# EAGLE board OpenBook Schematic v34 (EAGLE 9.7.0)
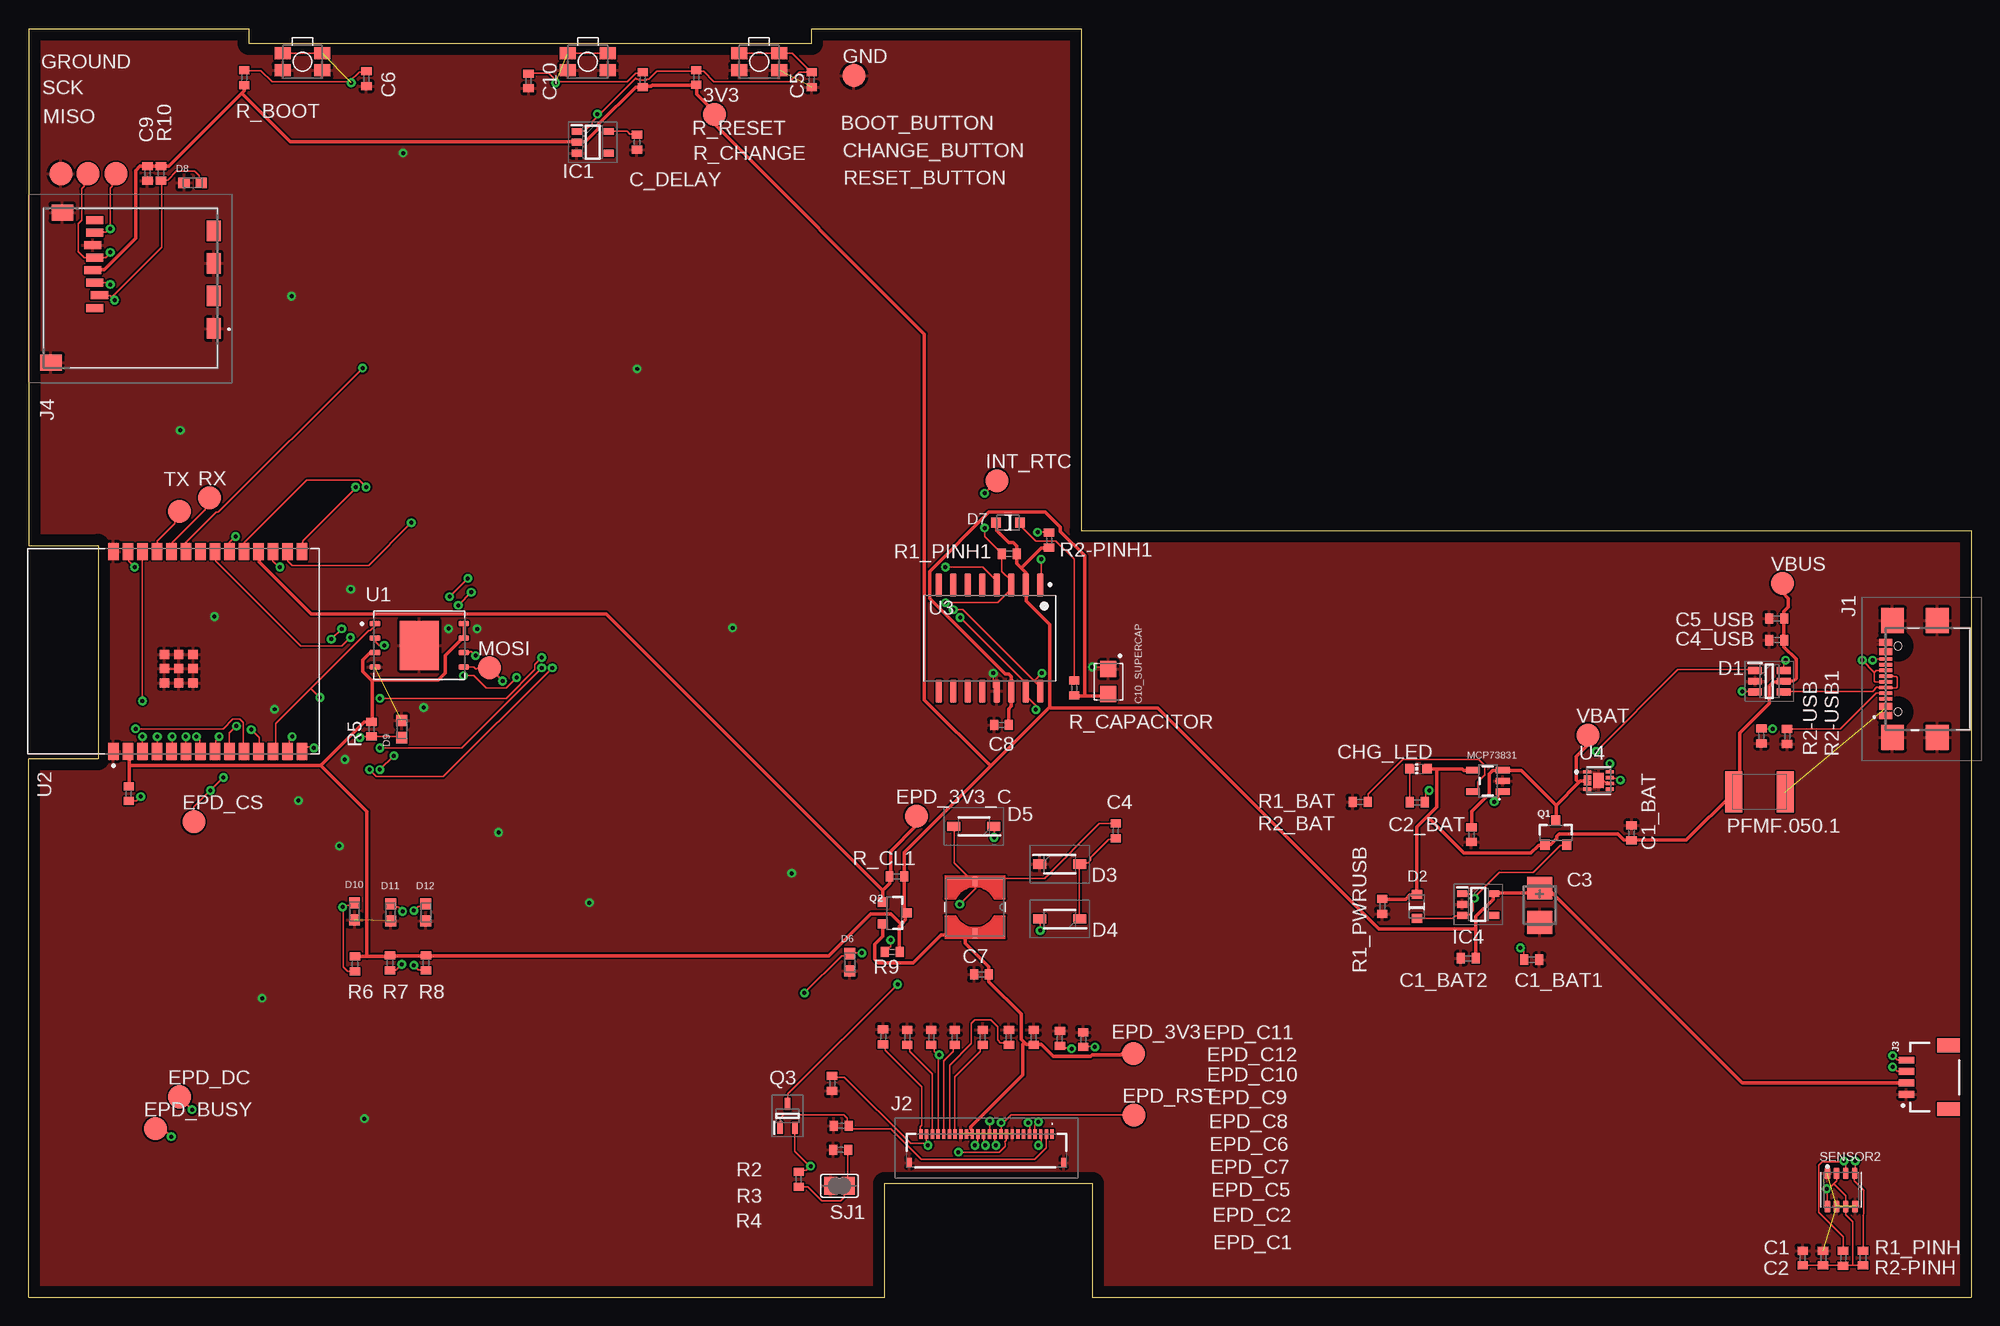
[diagram p0: board, top side]
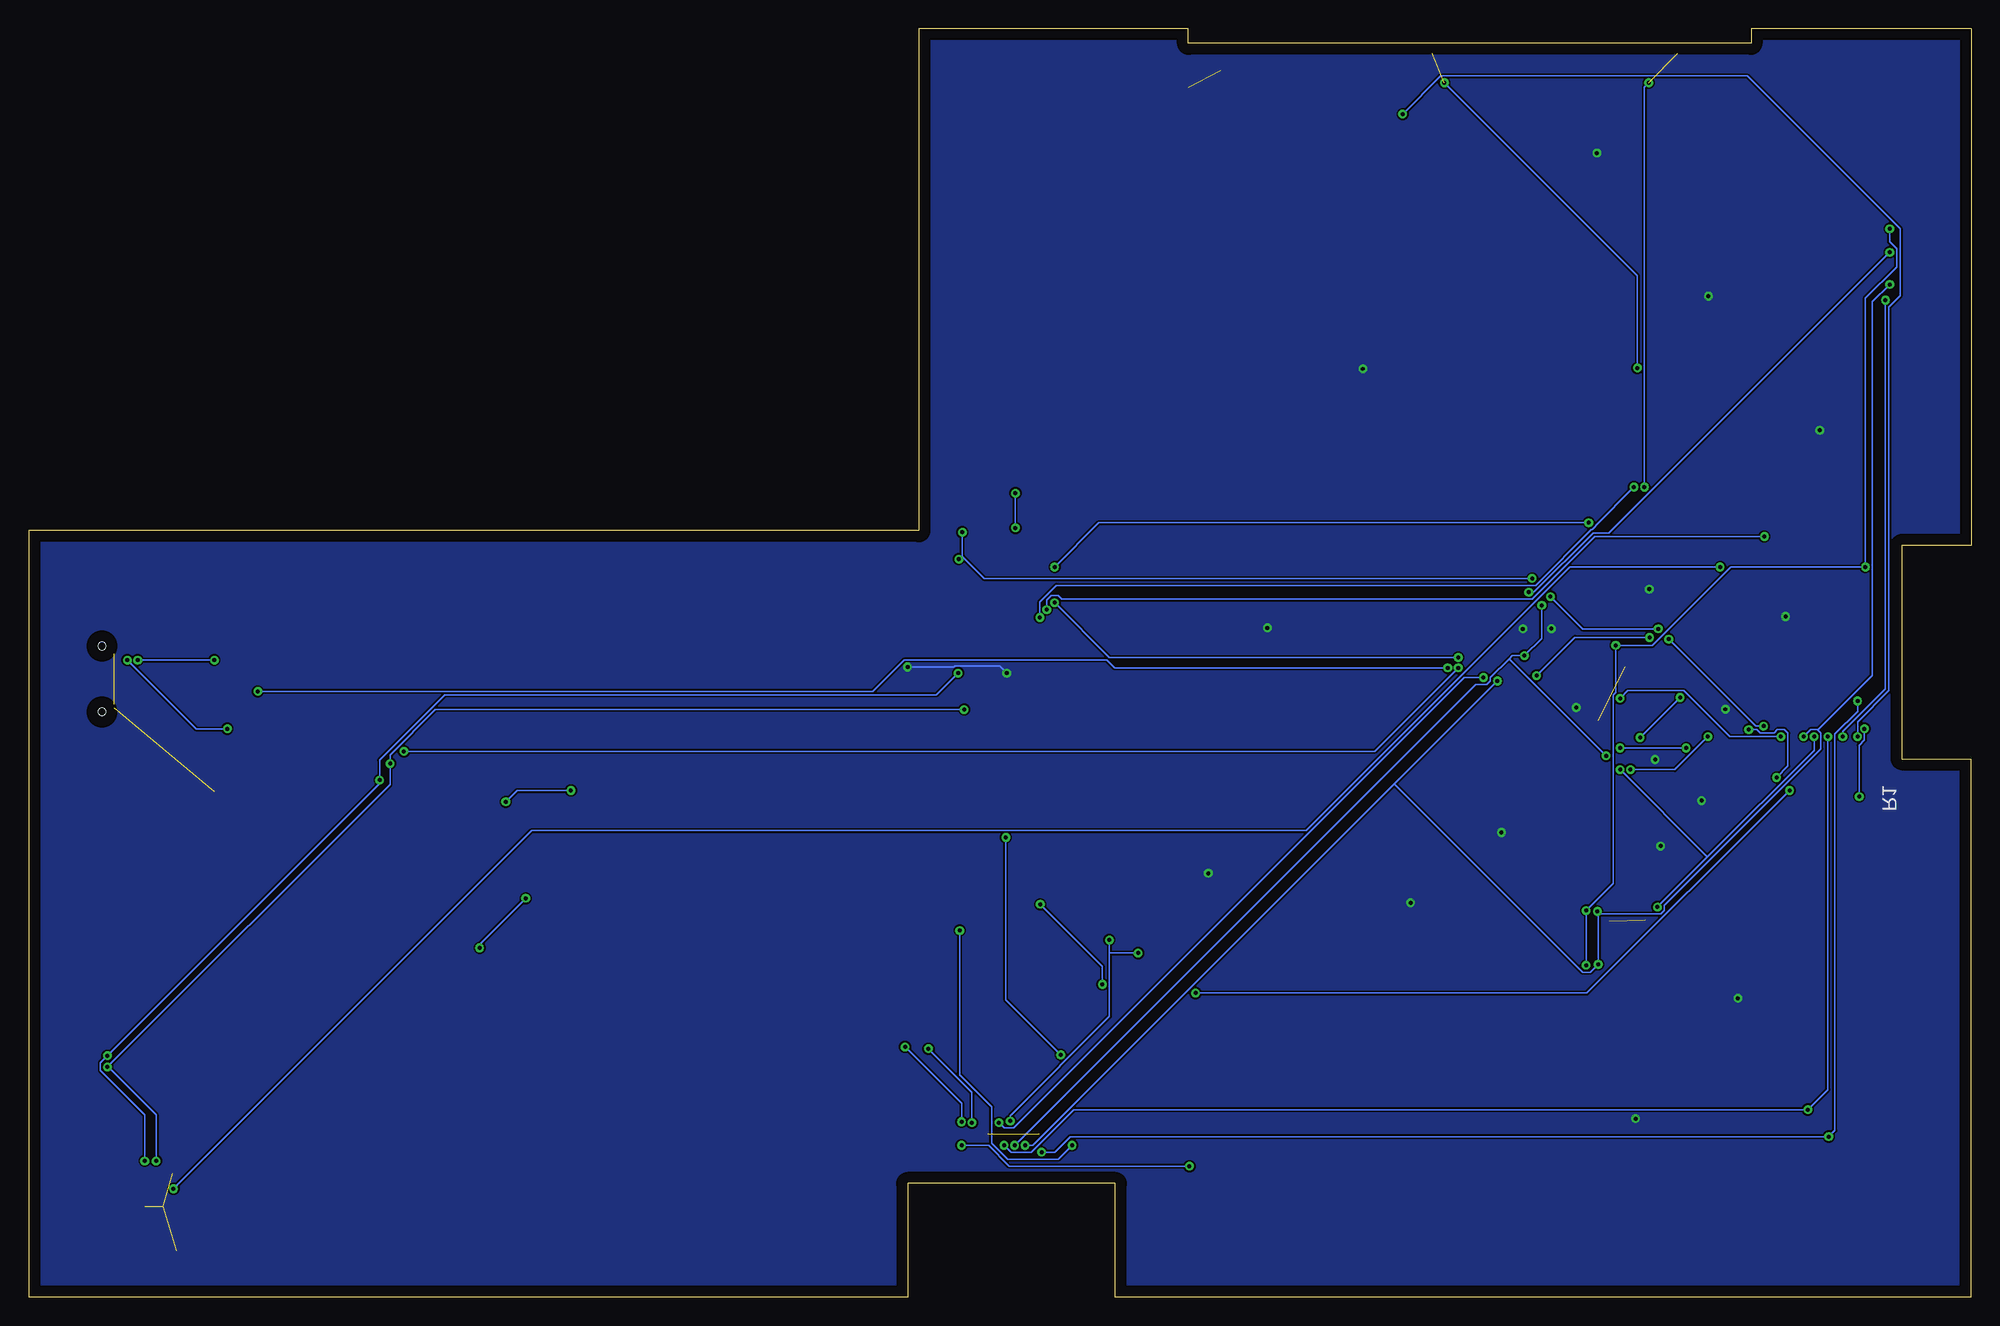
[diagram p1: board, bottom side, seen from below]

Size 170.2 x 111.2 mm. Coordinates in mm from the lower left corner, seen from the top.
Outline: 0.01,47.3 0,47.31
Outline: 92.2,111.2 92.2,67.2 170.2,67.2 170.2,0 93.2,0 93.2,10 75,10 75,0 0,0 0,47.2 6.1,47.2 6.1,65.9 0,65.9 0,111.2 19.3,111.2 19.3,109.9 68.6,109.9 68.6,111.2 92.2,111.2
Copper layers (1*16): Top 0.035mm / dielectric 1.5mm / Bottom 0.035mm
Design rules "jlcpcb-2layers.dru": minimum track width 6mil, minimum drill 0.35mm, track to track 6mil, track to pad 6mil, pad to pad 6mil, via to via 6mil, smd to smd 6mil, copper to edge 40mil, drill to drill 6mil, minimum pad ring 10mil, minimum via ring 8mil, stop-mask expansion 4mil, vias tented up to drill 0mil, thermal gap 10mil
Net classes: 1 POWER NETS: width 0.3 mm; 2 NORMAL NETS: width 0.15 mm

## Footprints (pad centres in the part's own frame; a part is rotated, then mirrored left to right if it is on the bottom)
TP20R = smd 2 x 2: TP 0,0
MYBUTTON = smd 1.4 x 1.05: 1 1.75,0.75; 2 -1.75,0.75; 3 -1.75,-0.75; 4 1.75,-0.75
EAGLE-LTSPICE_C0402 = smd 0.7 x 0.9: 1 -0.65,0; 2 0.65,0
RCL_CT3528 = smd 2 x 2.2: + -1.5,0; - 1.5,0
CAPCP3225X100N = smd 1.4 x 1.4: 1 -1.1,0; 2 1.1,0
ADAFRUIT_CHIP-LED0603 = smd 0.8 x 0.8: A 0,-0.75; C 0,0.75
SOT95P280X145-6N = smd 1.2 x 0.6: 1 -1.25,0.95; 2 -1.25,0; 3 -1.25,-0.95; 4 1.25,-0.95; 5 1.25,0; 6 1.25,0.95
ESP32_WROVER_AVX---SD0805S020S1R0_AVX_SD0805S020S1R0_0 = smd 0.8 x 0.9: 1 -1.05,0; 2 1.05,0
SOD3716X135N = smd 1.15 x 0.8: 1 -1.75,0; 2 1.75,0
DIOC1608X36N = smd 0.97 x 0.94: 1 -0.75,0; 2 0.75,0
SOT95P280X125-5N = smd 0.9 x 0.6: 1 -1.4,0.95; 2 -1.4,0; 3 -1.4,-0.95; 4 1.4,-0.95; 5 1.4,0.95
SOT95P280X120-5N = smd 0.9 x 0.6: 1 -1.4,0.95; 2 -1.4,0; 3 -1.4,-0.95; 4 1.4,-0.95; 5 1.4,0.95
SAMACSYS_PARTS_USB4110GFA = smd 0.3 x 1.15: A1 -3.35,3.678; A4 -2.55,3.678; A5 -1.25,3.678; A6 -0.25,3.678; A7 0.25,3.678; A8 1.25,3.678; A9 2.55,3.678; A12 3.35,3.678; B1 3.05,3.678; B4 2.25,3.678; B5 1.75,3.678; B6 0.75,3.678; B7 -0.75,3.678; B8 -1.75,3.678; B9 -2.25,3.678; B12 -3.05,3.678 | smd 2.18 x 2: MP1 -5.11,-0.827; MP2 5.11,-0.827; MP3 -5.11,3.103; MP4 5.11,3.103 | hole 0.65: -2.89,2.603; 2.89,2.603
FH34SRJ24S05SH99 = smd 0.3 x 0.8: 1 5.75,1.45; 2 5.25,1.45; 3 4.75,1.45; 4 4.25,1.45; 5 3.75,1.45; 6 3.25,1.45; 7 2.75,1.45; 8 2.25,1.45; 9 1.75,1.45; 10 1.25,1.45; 11 0.75,1.45; 12 0.25,1.45; 13 -0.25,1.45; 14 -0.75,1.45; 15 -1.25,1.45; 16 -1.75,1.45; 17 -2.25,1.45; 18 -2.75,1.45; 19 -3.25,1.45; 20 -3.75,1.45; 21 -4.25,1.45; 22 -4.75,1.45; 23 -5.25,1.45; 24 -5.75,1.45 | smd 0.4 x 0.8: MP1 6.75,-1.05; MP2 -6.75,-1.05
JST04_1MM_RA = smd 0.6 x 1.35: 1 -1.5,0; 2 -0.5,0; 3 0.5,0; 4 1.5,0 | smd 1.2 x 2: NC1 2.8,-3.675; NC2 -2.8,-3.675
112ATAARR03ATTEND = smd 1.8 x 1.2: G1 10.6,10.4; G2 4.9,10.4; S1 7.75,10.4; S2 2.05,10.4 | smd 1.4 x 1.9: G3 13.6,-3.85; G4 0.45,-2.85 | smd 0.7 x 1.5: P1 8.8,0; P2 7.7,0.4; P3 6.6,0; P4 5.5,-0.2; P5 4.4,0; P6 3.3,-0.2; P7 2.2,0; P8 1.1,0
IND_4828-WE-TPC_WRE = smd 0.813 x 0.406: 1 -2.286,0; 2 2.286,0
ESP32_WROVER_SPARKFUN-IC-POWER_SOT23-5 = smd 0.55 x 1.2: 1 -0.95,-1.3; 2 0,-1.3; 3 0.95,-1.3; 4 0.95,1.3; 5 -0.95,1.3
ESP32C6_VARISTOR_CT/CN1812 = smd 1.5 x 3.6: 1 -2.25,0; 2 2.25,0
ESP32_WROVER_SPARKFUN-DISCRETESEMI_SOT23-3 = smd 0.8 x 0.9: 1 -0.95,-1; 2 0.95,-1; 3 0,1.1
SOT65P210X110-3N = smd 1.05 x 0.5: 1 -1.05,0.65; 2 -1.05,-0.65; 3 1.05,0
ESP32_WROVER_EAGLE-LTSPICE_R0402 = smd 0.7 x 0.9: 1 -0.65,0; 2 0.65,0
ESP32_WROVER_BME680_PSON80P300X300X100-8N = smd 1.016 x 0.5: 1 1.458,1.2; 2 1.458,0.4; 3 1.458,-0.4; 4 1.458,-1.2; 5 -1.458,-1.22; 6 -1.458,-0.4; 7 -1.458,0.4; 8 -1.458,1.2
SJ = smd 1.168 x 1.6: 1 -0.762,0; 2 0.762,0
SON127P600X800X80-9N = smd 0.94 x 0.44: 1 -3.895,1.905; 2 -3.895,0.635; 3 -3.895,-0.635; 4 -3.895,-1.905; 5 3.895,-1.905; 6 3.895,-0.635; 7 3.895,0.635; 8 3.895,1.905 | smd 3.4 x 4.3: 9 0,0
XCVR_ESP32-C6-WROOM-1-N8 = smd 1.5 x 0.9: 1 -8.75,5.26; 2 -8.75,3.99; 3 -8.75,2.72; 4 -8.75,1.45; 5 -8.75,0.18; 6 -8.75,-1.09; 7 -8.75,-2.36; 8 -8.75,-3.63; 9 -8.75,-4.9; 10 -8.75,-6.17; 11 -8.75,-7.44; 12 -8.75,-8.71; 13 -8.75,-9.98; 14 -8.75,-11.25; 15 8.75,-11.25; 16 8.75,-9.98; 17 8.75,-8.71; 18 8.75,-7.44; 19 8.75,-6.17; 20 8.75,-4.9; 21 8.75,-3.63; 22 8.75,-2.36; 23 8.75,-1.09; 24 8.75,0.18; 25 8.75,1.45; 26 8.75,2.72; 27 8.75,3.99; 28 8.75,5.26 | smd 0.8 x 0.8: 29_1 -2.755,0.79; 29_2 -1.505,0.79; 29_3 -0.255,0.79; 29_4 -2.755,-0.46; 29_5 -1.505,-0.46; 29_6 -0.255,-0.46; 29_7 -2.755,-1.71; 29_8 -1.505,-1.71; 29_9 -0.255,-1.71
SOIC127P1032X265-16N = smd 2.05 x 0.59: 1 -4.655,4.445; 2 -4.655,3.175; 3 -4.655,1.905; 4 -4.655,0.635; 5 -4.655,-0.635; 6 -4.655,-1.905; 7 -4.655,-3.175; 8 -4.655,-4.445; 9 4.655,-4.445; 10 4.655,-3.175; 11 4.655,-1.905; 12 4.655,-0.635; 13 4.655,0.635; 14 4.655,1.905; 15 4.655,3.175; 16 4.655,4.445
SON50P200X200X80-9N = smd 0.76 x 0.27: 1 -0.985,0.75; 4 -0.985,-0.75; 5 0.985,-0.75; 6 0.985,-0.25; 7 0.985,0.25; 8 0.985,0.75 | smd 0.762 x 0.406: 2 -0.985,0.25; 3 -0.985,-0.25 | smd 0.9 x 1.3: 9 0,0

## Placement (x,y rotation side)
3V3  TPTP20R  [TP20R]  60.08,103.68 0 top
BOOT_BUTTON  BUTTON_CUSYOMV1  [MYBUTTON]  24,108.29 180 top
C1  100nF  [EAGLE-LTSPICE_C0402]  155.43,3.45 90 top
C1_BAT  4.7uF  [EAGLE-LTSPICE_C0402]  140.42,40.7 90 top
C1_BAT1  4.7uF  [EAGLE-LTSPICE_C0402]  131.69,29.6 0 top
C1_BAT2  4.7uF  [EAGLE-LTSPICE_C0402]  126.12,29.73 180 top
C2  100nF  [EAGLE-LTSPICE_C0402]  157.2,3.45 90 top
C2_BAT  4.7uF  [EAGLE-LTSPICE_C0402]  126.4,40.55 270 top
C3  100uF TANT  [RCL_CT3528]  132.38,34.37 270 top
C4  4.7uF/25V  [EAGLE-LTSPICE_C0402]  95.24,40.87 90 top
C4_USB  100nF  [EAGLE-LTSPICE_C0402]  153.15,57.6 180 top
C5  1uF  [EAGLE-LTSPICE_C0402]  68.6,106.71 270 top
C5_USB  4.7uF  [EAGLE-LTSPICE_C0402]  153.15,59.5 180 top
C6  100nF  [EAGLE-LTSPICE_C0402]  29.6,106.8 270 top
C7  10uF  [EAGLE-LTSPICE_C0402]  83.48,28.32 180 top
C8  100nF  [EAGLE-LTSPICE_C0402]  85.23,50.16 180 top
C9  100nF  [EAGLE-LTSPICE_C0402]  10.42,98.5 270 top
C10  100nF  [EAGLE-LTSPICE_C0402]  43.8,106.6 270 top
C10_SUPERCAP  CPH3225A  [CAPCP3225X100N]  94.6,53.97 270 top
C_DELAY  100nF  [EAGLE-LTSPICE_C0402]  53.3,101.23 270 top
CHANGE_BUTTON  BUTTON_CUSYOMV1  [MYBUTTON]  49,108.29 180 top
CHG_LED  [ADAFRUIT_CHIP-LED0603]  121.76,46.33 90 top
D1  USBLC6-2SC6Y  [SOT95P280X145-6N]  152.5,54 0 top
D2  ESP32_WROVER_AVX---SD0805S020S1R0_AVX_SD0805S020S1R0_0_0AVX_SD0805S020S1R0_0_0  [ESP32_WROVER_AVX---SD0805S020S1R0_AVX_SD0805S020S1R0_0]  121.62,34.27 90 top
D3  MBR0530  [SOD3716X135N]  90.33,37.97 0 top
D4  MBR0530  [SOD3716X135N]  90.33,33.16 180 top
D5  MBR0530  [SOD3716X135N]  82.81,41.28 180 top
D6  PGB1010603MR  [DIOC1608X36N]  71.94,29.38 90 top
D7  ESP32_WROVER_AVX---SD0805S020S1R0_AVX_SD0805S020S1R0_0_0AVX_SD0805S020S1R0_0_0  [ESP32_WROVER_AVX---SD0805S020S1R0_AVX_SD0805S020S1R0_0]  85.8,67.9 180 top
D8  PGB1010603MR  [DIOC1608X36N]  14.37,97.67 0 top
D9  PGB1010603MR  [DIOC1608X36N]  32.7,49.8 270 top
D10  PGB1010603MR  [DIOC1608X36N]  28.56,33.83 90 top
D11  PGB1010603MR  [DIOC1608X36N]  31.72,33.73 90 top
D12  PGB1010603MR  [DIOC1608X36N]  34.8,33.73 90 top
EPD_3V3  TPTP20R  [TP20R]  96.78,21.38 0 top
EPD_3V3_C  TPTP20R  [TP20R]  77.78,42.18 0 top
EPD_BUSY  TPTP20R  [TP20R]  11.11,14.78 0 top
EPD_C1  1uF/50V  [EAGLE-LTSPICE_C0402]  92.4,22.59 270 top
EPD_C2  1uF/50V  [EAGLE-LTSPICE_C0402]  90.35,22.69 270 top
EPD_C5  0.1uF/50V  [EAGLE-LTSPICE_C0402]  88.06,22.79 270 top
EPD_C6  1uF/50V  [EAGLE-LTSPICE_C0402]  83.6,22.79 270 top
EPD_C7  1uF/50V  [EAGLE-LTSPICE_C0402]  85.88,22.79 270 top
EPD_C8  1uF/50V  [EAGLE-LTSPICE_C0402]  81.14,22.79 270 top
EPD_C9  1uF/50V  [EAGLE-LTSPICE_C0402]  79.07,22.79 270 top
EPD_C10  1uF/50V  [EAGLE-LTSPICE_C0402]  76.97,22.79 270 top
EPD_C11  1uF/50V  [EAGLE-LTSPICE_C0402]  70.39,18.75 90 top
EPD_C12  1uF/50V  [EAGLE-LTSPICE_C0402]  74.86,22.85 270 top
EPD_CS  TPTP20R  [TP20R]  14.48,41.68 0 top
EPD_DC  TPTP20R  [TP20R]  13.23,17.58 0 top
EPD_RST  TPTP20R  [TP20R]  96.83,15.98 0 top
GND  TPTP20R  [TP20R]  72.31,107.08 0 top
GROUND  TPTP20R  [TP20R]  2.83,98.48 0 top
IC1  BD5229G-TR  [SOT95P280X125-5N]  49.43,101.23 0 top
IC4  XC6220A331MR-G  [SOT95P280X120-5N]  127,34.44 0 top
INT_RTC  TPTP20R  [TP20R]  84.83,71.58 0 top
J1  SAMACSYS_PARTS_USB4110-GF-A  [SAMACSYS_PARTS_USB4110GFA]  166.38,54.2 90 top
J2  FH34SRJ-24S-0.5SH_99_  [FH34SRJ24S05SH99]  83.92,12.87 0 top
J3  QWIIC_RIGHT_ANGLE  [JST04_1MM_RA]  164.51,19.3 90 top
J4  112A-TAAR-R03_ATTEND  [112ATAARR03ATTEND]  5.82,95.52 270 top
L1  68uH  [IND_4828-WE-TPC_WRE]  82.91,34.2 270 top
MCP73831  ESP32_WROVER_SPARKFUN-IC-POWER_MCP73831  [ESP32_WROVER_SPARKFUN-IC-POWER_SOT23-5]  127.84,45.26 90 top
MISO  TPTP20R  [TP20R]  7.65,98.48 0 top
MOSI  TPTP20R  [TP20R]  40.37,55.18 0 top
PFMF.050.1  ESP32C6_VARISTORCN1812  [ESP32C6_VARISTOR_CT/CN1812]  151.64,44.31 180 top
Q1  20V/4.2A/52mΩ/1.4W  [ESP32_WROVER_SPARKFUN-DISCRETESEMI_SOT23-3]  133.79,40.69 0 top
Q2  20V/4.2A/52mΩ/1.4W  [ESP32_WROVER_SPARKFUN-DISCRETESEMI_SOT23-3]  75.83,33.69 270 top
Q3  SI1308EDL-T1-GE3  [SOT65P210X110-3N]  66.48,15.91 90 top
R1  10K  [ESP32_WROVER_EAGLE-LTSPICE_R0402]  8.78,44.15 90 top
R1_BAT  200  [ESP32_WROVER_EAGLE-LTSPICE_R0402]  121.66,43.39 0 top
R1_PINH  10K  [ESP32_WROVER_EAGLE-LTSPICE_R0402]  158.95,3.45 270 top
R1_PINH1  10K  [ESP32_WROVER_EAGLE-LTSPICE_R0402]  85.9,65.17 0 top
R1_PWRUSB  100k  [ESP32_WROVER_EAGLE-LTSPICE_R0402]  118.58,34.27 90 top
R2  2.2  [ESP32_WROVER_EAGLE-LTSPICE_R0402]  71.14,12.93 0 top
R2-PINH  10K  [ESP32_WROVER_EAGLE-LTSPICE_R0402]  160.7,3.45 270 top
R2-PINH1  10K  [ESP32_WROVER_EAGLE-LTSPICE_R0402]  89.4,66.36 270 top
R2-USB  5k1  [ESP32_WROVER_EAGLE-LTSPICE_R0402]  151.8,49.2 270 top
R2-USB1  5k1  [ESP32_WROVER_EAGLE-LTSPICE_R0402]  154.05,49.17 90 top
R2_BAT  2K  [ESP32_WROVER_EAGLE-LTSPICE_R0402]  116.65,43.43 0 top
R3  0.47  [ESP32_WROVER_EAGLE-LTSPICE_R0402]  67.48,10.36 90 top
R4  10K  [ESP32_WROVER_EAGLE-LTSPICE_R0402]  71.19,15.04 0 top
R5  10K  [ESP32_WROVER_EAGLE-LTSPICE_R0402]  30.05,49.8 90 top
R6  10K  [ESP32_WROVER_EAGLE-LTSPICE_R0402]  28.6,29.22 90 top
R7  10K  [ESP32_WROVER_EAGLE-LTSPICE_R0402]  31.66,29.32 90 top
R8  10K  [ESP32_WROVER_EAGLE-LTSPICE_R0402]  34.82,29.32 90 top
R9  10K  [ESP32_WROVER_EAGLE-LTSPICE_R0402]  75.65,30.29 0 top
R10  10K  [ESP32_WROVER_EAGLE-LTSPICE_R0402]  11.6,98.5 90 top
R_BOOT  10K  [ESP32_WROVER_EAGLE-LTSPICE_R0402]  18.9,106.9 270 top
R_CAPACITOR  15  [ESP32_WROVER_EAGLE-LTSPICE_R0402]  91.6,53.4 270 top
R_CHANGE  10K  [ESP32_WROVER_EAGLE-LTSPICE_R0402]  53.8,106.71 270 top
R_CL1  10K  [ESP32_WROVER_EAGLE-LTSPICE_R0402]  76.07,36.89 0 top
R_RESET  10K  [ESP32_WROVER_EAGLE-LTSPICE_R0402]  58.5,106.91 270 top
RESET_BUTTON  BUTTON_CUSYOMV1  [MYBUTTON]  64,108.29 180 top
RX  TPTP20R  [TP20R]  15.87,70.08 0 top
SCK  TPTP20R  [TP20R]  5.19,98.48 0 top
SENSOR2  ESP32_WROVER_BME680_BME680  [ESP32_WROVER_BME680_PSON80P300X300X100-8N]  158.78,9.43 90 top
SJ1  [SJ]  71.04,9.79 0 top
TX  TPTP20R  [TP20R]  13.22,68.88 0 top
U1  W25Q512JVEIQ  [SON127P600X800X80-9N]  34.23,57.15 0 top
U2  ESP32-C6-WROOM-1-N8  [XCVR_ESP32-C6-WROOM-1-N8]  12.7,56.61 90 top
U3  DS3231SN#  [SOIC127P1032X265-16N]  84.19,57.78 270 top
U4  MAX17048G+T10  [SON50P200X200X80-9N]  137.53,45.3 0 top
VBAT  TPTP20R  [TP20R]  136.59,49.28 0 top
VBUS  TPTP20R  [TP20R]  153.63,62.58 0 top

## Library data of the parts
3V3 BOOT_BUTTON CHANGE_BUTTON CHG_LED EPD_3V3 EPD_3V3_C EPD_BUSY EPD_CS EPD_DC EPD_RST GND GROUND INT_RTC MISO MOSI PFMF.050.1 RESET_BUTTON RX SCK SJ1 TX VBAT VBUS = DeskAssistant v19 v1
C1 C1_BAT C1_BAT1 C1_BAT2 C2 C2_BAT C4 C4_USB C5 C5_USB C6-C10 C_DELAY EPD_C1 EPD_C2 EPD_C5-EPD_C12 = DeskAssistant v19 v1; SPICEMODEL: NONE; SPICEPREFIX: C
C3 = DeskAssistant v19 v1; SPICEPREFIX: C
C10_SUPERCAP = DeskAssistant v19 v1; AVAILABILITY: Not in stock; CHECK_PRICES: https://www.snapeda.com/parts/CPH3225A/Seiko+Instruments/view-part/?ref=eda; DESCRIPTION: 11 mF (EDLC) Supercapacitor 3.3 V 1210 (3225 Metric) - -; MF: Seiko Instruments; MP: CPH3225A; PACKAGE: 1210 Seiko; PRICE: None; PURCHASE-URL: https://www.snapeda.com/api/url_track_click_mouser/?unipart_id=562593&manufacturer=Seiko Instruments&part_name=CPH3225A&search_term=None; SNAPEDA_LINK: https://www.snapeda.com/parts/CPH3225A/Seiko+Instruments/view-part/?ref=snap
D1 = DeskAssistant v19 v1; AVAILABILITY: In Stock; CHECK_PRICES: https://www.snapeda.com/parts/USBLC6-2SC6Y/STMicroelectronics/view-part/?ref=eda; DESCRIPTION: 17V Clamp 5A (8/20µs) Ipp Tvs Diode Surface Mount SOT-23-6; MF: STMicroelectronics; MP: USBLC6-2SC6Y; PACKAGE: SOT-23-6 STMicroelectronics; PRICE: None; SNAPEDA_LINK: https://www.snapeda.com/parts/USBLC6-2SC6Y/STMicroelectronics/view-part/?ref=snap
D2 D7 = DeskAssistant v19 v1; CENTROID_NOT_SPECIFIED: No; DATASHEET: http://datasheets.avx.com/schottky.pdf; DIGIKEY_DESCRIPTION: DIODE SCHOTTKY 20V 1A 0805; DIGIKEY_PART_NUMBER: 478-7800-1-ND; LEAD_FREE: yes; MF: AVX; MOUSER_PART_NUMBER: 581-SD0805S020S1R0; PACKAGE: 0805 (2012 metric); PREFIX: D; ROHS: yes; TEMPERATURE_RANGE_HIGH: +125°C; TEMPERATURE_RANGE_LOW: -55°C
D3-D5 = DeskAssistant v19 v1; AVAILABILITY: In Stock; CHECK_PRICES: https://www.snapeda.com/parts/MBR0530/Onsemi/view-part/?ref=eda; DESCRIPTION: Diode Schottky 30 V 500mA Surface Mount SOD-123; MF: ON Semiconductor; MP: MBR0530; PACKAGE: SOD-123-2 ON Semiconductor; PRICE: None; PURCHASE-URL: https://www.snapeda.com/api/url_track_click_mouser/?unipart_id=179458&manufacturer=ON Semiconductor&part_name=MBR0530&search_term=None; SNAPEDA_LINK: https://www.snapeda.com/parts/MBR0530/Onsemi/view-part/?ref=snap
D6 D8-D12 = DeskAssistant v19 v1; AVAILABILITY: In Stock; CHECK_PRICES: https://www.snapeda.com/parts/PGB1010603MR/Littelfuse/view-part/?ref=eda; DESCRIPTION: 150V (Typ) Clamp - Ipp Tvs Diode Surface Mount 0603 (1608 Metric); MF: Littelfuse Inc.; MP: PGB1010603MR; PACKAGE: 0603 Littelfuse Inc.; PRICE: None; PURCHASE-URL: https://www.snapeda.com/api/url_track_click_mouser/?unipart_id=5659453&manufacturer=Littelfuse Inc.&part_name=PGB1010603MR&search_term=None; SNAPEDA_LINK: https://www.snapeda.com/parts/PGB1010603MR/Littelfuse/view-part/?ref=snap
IC1 = DeskAssistant v19 v1; DESCRIPTION: Voltage Detector with Adjustable Delay Time: CMOS processes are utilized to develop high precision, low current consumption CMOS reset ICs that allow arbitrary setting of the delay time. The extensive lineup includes both Nch Open Drain and CMOS output types in a wide range of detection voltages (from 2.3V to 6.0V, in 0.1V steps), enabling selection of the ideal solution based on customer requirements. In addition, the entire series is of course both lead-free and RoHS-compliant.; HEIGHT: 1.25mm; MANUFACTURER_NAME: ROHM Semiconductor; MANUFACTURER_PART_NUMBER: BD5229G-TR; MOUSER_PART_NUMBER: 755-BD5229G-TR; MOUSER_PRICE-STOCK: https://www.mouser.co.uk/ProductDetail/ROHM-Semiconductor/BD5229G-TR?qs=4kLU8WoGk0vvnhrrYwdszw%3D%3D
IC4 = DeskAssistant v19 v1; DESCRIPTION: LDO Voltage Regulators; HEIGHT: 1.2mm; MANUFACTURER_NAME: Torex; MANUFACTURER_PART_NUMBER: XC6220A331MR-G; MOUSER_PART_NUMBER: 865-XC6220A331MR-G; MOUSER_PRICE-STOCK: https://www.mouser.co.uk/ProductDetail/Torex-Semiconductor/XC6220A331MR-G?qs=AsjdqWjXhJ8ZSWznL1J0gg%3D%3D
J1 = DeskAssistant v19 v1; DESCRIPTION: CONN USB 2.0 TYPE-C R/A SMT; HEIGHT: 3.26mm; MANUFACTURER_NAME: GCT (GLOBAL CONNECTOR TECHNOLOGY); MANUFACTURER_PART_NUMBER: USB4110-GF-A; MOUSER_PART_NUMBER: 640-USB4110-GF-A; MOUSER_PRICE-STOCK: https://www.mouser.co.uk/ProductDetail/GCT/USB4110-GF-A?qs=KUoIvG%2F9IlYiZvIXQjyJeA%3D%3D
J2 = DeskAssistant v19 v1; DESCRIPTION: 24 Position FFC, FPC Connector Contacts, Top and Bottom 0.020" (0.50mm) Surface Mount, Right Angle; HEIGHT: 1.1mm; MANUFACTURER_NAME: Hirose; MANUFACTURER_PART_NUMBER: FH34SRJ-24S-0.5SH(99); MOUSER_PART_NUMBER: 798-FH34SRJ24S05SH99; MOUSER_PRICE-STOCK: https://www.mouser.co.uk/ProductDetail/Hirose-Connector/FH34SRJ-24S-0.5SH99?qs=vcbW%252B4%252BSTIpKBl5ap9J8Fw%3D%3D
J3 = DeskAssistant v19 v1; PROD_ID: CONN-13694
J4 = DeskAssistant v19 v1; DESCRIPTION: Micro SD Card Socket, Push-Push Type, Top Mount, SMT, H=1.83mm, 10u; HEIGHT: 1.9mm; MANUFACTURER_NAME: ATTEND; MANUFACTURER_PART_NUMBER: 112A-TAAR-R03 ATTEND
L1 = DeskAssistant v19 v1; COPYRIGHT: Copyright (C) 2024 Ultra Librarian. All rights reserved.; MANUFACTURER_PART_NUMBER: 744043680; MFR_NAME: Wurth Electronics
MCP73831 = DeskAssistant v19 v1; PROD_ID: IC-09995
Q1 Q2 = DeskAssistant v19 v1; PROD_ID: TRAN-14388
Q3 = DeskAssistant v19 v1; AVAILABILITY: In Stock; CHECK_PRICES: https://www.snapeda.com/parts/SI1308EDL-T1-GE3/Vishay+Siliconix/view-part/?ref=eda; DESCRIPTION: Si1308EDL-T1-GE3 N-channel MOSFET Transistor, 1.5 A, 30 V, 3-Pin SC-70 | Siliconix / Vishay SI1308EDL-T1-GE3; MF: Vishay Siliconix; MP: SI1308EDL-T1-GE3; PACKAGE: SOT-323 Vishay Semiconductor; PRICE: None; PURCHASE-URL: https://www.snapeda.com/api/url_track_click_mouser/?unipart_id=274603&manufacturer=Vishay Siliconix&part_name=SI1308EDL-T1-GE3&search_term=None; SNAPEDA_LINK: https://www.snapeda.com/parts/SI1308EDL-T1-GE3/Vishay+Siliconix/view-part/?ref=snap
R1 R1_BAT R1_PINH R1_PINH1 R1_PWRUSB R2 R2-PINH R2-PINH1 R2-USB R2-USB1 R2_BAT R3-R10 R_BOOT R_CAPACITOR R_CHANGE R_CL1 R_RESET = DeskAssistant v19 v1; SPICEMODEL: NONE; SPICEPREFIX: R
SENSOR2 = DeskAssistant v19 v1; AVAILABILITY: Unavailable; DESCRIPTION: Integrated Environmental Unit; MF: Bosch Sensortec; MP: BME680; PACKAGE: LGA-8 Bosch Tools; PRICE: None
U1 = DeskAssistant v19 v1; AVAILABILITY: In Stock; CHECK_PRICES: https://www.snapeda.com/parts/W25Q512JVEIQ/Winbond+Electronics/view-part/?ref=eda; DESCRIPTION: FLASH - NOR Memory IC 512Mb (64M x 8) SPI - Quad I/O 133 MHz 8-WSON (8x6); MF: Winbond Electronics; MP: W25Q512JVEIQ; PACKAGE: Package; PRICE: None; SNAPEDA_LINK: https://www.snapeda.com/parts/W25Q512JVEIQ/Winbond+Electronics/view-part/?ref=snap
U2 = DeskAssistant v19 v1; AVAILABILITY: In Stock; CHECK_PRICES: https://www.snapeda.com/parts/ESP32-C6-WROOM-1-N8/Espressif+Systems/view-part/?ref=eda; DESCRIPTION: Multiprotocol Modules ESP32-C6 module, Wi-Fi 6 in 2.4 GHz band, Bluetooth 5, Zigbee 3.0 and Thread. ESP34-WROOM Compatible - ENGINEERING SAMPLE; MF: Espressif Systems; MP: ESP32-C6-WROOM-1-N8; PACKAGE: None; PRICE: None; SNAPEDA_LINK: https://www.snapeda.com/parts/ESP32-C6-WROOM-1-N8/Espressif+Systems/view-part/?ref=snap
U3 = DeskAssistant v19 v1; AVAILABILITY: In Stock; CHECK_PRICES: https://www.snapeda.com/parts/DS3231SN%23/Analog+Devices/view-part/?ref=eda; DESCRIPTION: Extremely Accurate I²C-Integrated RTC/TCXO/Crystal; MF: Analog Devices; MP: DS3231SN#; PACKAGE: SOIC-16 Maxim; PRICE: None; PURCHASE-URL: https://www.snapeda.com/api/url_track_click_mouser/?unipart_id=99048&manufacturer=Analog Devices&part_name=DS3231SN#&search_term=None; SNAPEDA_LINK: https://www.snapeda.com/parts/DS3231SN%23/Analog+Devices/view-part/?ref=snap
U4 = DeskAssistant v19 v1; AVAILABILITY: In Stock; CHECK_PRICES: https://www.snapeda.com/parts/MAX17048G+T10/Analog+Devices/view-part/?ref=eda; DESCRIPTION: 3µA 1-Cell/2-Cell Fuel Gauge with ModelGauge; MF: Analog Devices; MP: MAX17048G+T10; PACKAGE: TDFN-8 Maxim; PRICE: None; PURCHASE-URL: https://www.snapeda.com/api/url_track_click_mouser/?unipart_id=329239&manufacturer=Analog Devices&part_name=MAX17048G+T10&search_term=None; SNAPEDA_LINK: https://www.snapeda.com/parts/MAX17048G+T10/Analog+Devices/view-part/?ref=snap

## Nets
3V3 [POWER NETS]: 3V3.TP C1_BAT2.1 C3.+ C9.1 D7.2 IC1.2 IC4.5 J3.2 J4.P4 Q2.3 R1.2 R1_PINH1.2 R2-PINH1.2 R5.2 R6.2 R7.2 R8.2 R9.2 R10.2 R_BOOT.2 R_CHANGE.2 R_CL1.2 R_RESET.2 U1.3 U1.7 U1.8 U2.2 U3.2
32KHZ [NORMAL NETS]: R2-PINH1.1 U2.9 U3.1
DN [NORMAL NETS]: D1.4 J1.A7 J1.B7
DP [NORMAL NETS]: D1.6 J1.A6 J1.B6
EPD_3V3 [POWER NETS]: C7.1 EPD_3V3.TP EPD_C5.2 J2.15 J2.16 L1.2 Q2.2
EPD_3V3_C [POWER NETS]: EPD_3V3_C.TP Q2.1 R_CL1.1 U2.18
EPD_BUSY [NORMAL NETS]: EPD_BUSY.TP J2.9 U2.26
EPD_CS [NORMAL NETS]: D6.2 EPD_CS.TP J2.12 R9.1 U2.11
EPD_DC [NORMAL NETS]: EPD_DC.TP J2.11 U2.5
EPD_RST [NORMAL NETS]: EPD_RST.TP J2.10 U2.21
FLASH_CS [NORMAL NETS]: D9.2 R5.1 U1.1 U2.12
GDR [NORMAL NETS]: J2.2 Q3.1 R4.2
GND [NORMAL NETS]: BOOT_BUTTON.1 BOOT_BUTTON.2 C1.2 C1_BAT1.2 C1_BAT2.2 C1_BAT.2 C2.2 C2_BAT.2 C3.- C4_USB.2 C5.2 C5_USB.2 C6.2 C7.2 C8.2 C9.2 C10.2 C10_SUPERCAP.1 C_DELAY.2 CHANGE_BUTTON.1 CHANGE_BUTTON.2 D1.2 D3.1 D6.1 D8.1 D9.1 D10.1 D11.1 D12.1 EPD_C1.1 EPD_C2.1 EPD_C5.1 EPD_C6.1 EPD_C7.1 EPD_C8.1 EPD_C9.1 EPD_C10.1 EPD_C11.1 EPD_C12.1 GND.TP GROUND.TP IC1.3 IC4.2 J1.A1 J1.A12 J1.B1 J1.B12 J1.MP1 J1.MP2 J1.MP3 J1.MP4 J2.8 J2.17 J2.MP1 J2.MP2 J3.1 J4.G1 J4.G2 J4.G3 J4.G4 J4.P6 MCP73831.2 R1_PWRUSB.1 R2-USB1.1 R2-USB.2 R2.1 R2_BAT.1 R4.1 RESET_BUTTON.1 RESET_BUTTON.2 SENSOR2.1 SENSOR2.5 SENSOR2.7 SJ1.1 U1.4 U1.9 U2.1 U2.28 U2.29_1 U2.29_2 U2.29_3 U2.29_4 U2.29_5 U2.29_6 U2.29_7 U2.29_8 U2.29_9 U3.13 U4.1 U4.4 U4.6 U4.9
GPIO8 [NORMAL NETS]: R1.1 U2.10
I2C_PW [NORMAL NETS]: C1.1 C2.1 R1_PINH.2 R2-PINH.2 SENSOR2.2 SENSOR2.6 SENSOR2.8 U2.17
INT_RTC [NORMAL NETS]: INT_RTC.TP R1_PINH1.1 U2.8 U3.3
IO/BOOT [NORMAL NETS]: BOOT_BUTTON.3 BOOT_BUTTON.4 C6.1 R_BOOT.1 U2.15
IO/CHANGE [NORMAL NETS]: C10.1 CHANGE_BUTTON.3 CHANGE_BUTTON.4 R_CHANGE.1 U2.23
MISO [NORMAL NETS]: D12.2 J4.P7 MISO.TP R8.1 U1.2 U2.27
MOSI [NORMAL NETS]: D11.2 J2.14 J4.P3 MOSI.TP R7.1 U1.5 U2.7
N$1 [NORMAL NETS]: MCP73831.1 R1_BAT.2
N$2 [NORMAL NETS]: C1_BAT1.1 D2.1 IC4.1 IC4.3 Q1.2
N$3 [NORMAL NETS]: CHG_LED.C R1_BAT.1
N$4 [NORMAL NETS]: MCP73831.5 R2_BAT.2
N$5 [NORMAL NETS]: D7.1 R_CAPACITOR.1
N$6 [NORMAL NETS]: C_DELAY.1 IC1.5
N$7 [NORMAL NETS]: J1.A5 R2-USB1.2
N$8 [NORMAL NETS]: C4.1 D3.2 D4.1
N$9 [NORMAL NETS]: EPD_C1.2 J2.4
N$10 [NORMAL NETS]: J1.B5 R2-USB.1
N$11 [NORMAL NETS]: EPD_C2.2 J2.5
N$12 [NORMAL NETS]: EPD_C10.2 J2.22
N$15 [NORMAL NETS]: EPD_C12.2 J2.24
N$16 [NORMAL NETS]: EPD_C7.2 J2.19
N$17 [NORMAL NETS]: EPD_C8.2 J2.20
N$18 [NORMAL NETS]: EPD_C6.2 J2.18
PREVGH [NORMAL NETS]: D5.1 EPD_C9.2 J2.21
PREVGL [NORMAL NETS]: D4.2 EPD_C11.2 J2.23
RESE [NORMAL NETS]: J2.3 Q3.2 R3.2
RESE' [NORMAL NETS]: R2.2 R3.1 SJ1.2
RESET [NORMAL NETS]: C5.1 IC1.1 R_RESET.1 RESET_BUTTON.3 RESET_BUTTON.4 U2.3
RTC_RST [NORMAL NETS]: U2.16 U3.4
RX [NORMAL NETS]: RX.TP U2.24
SCK [NORMAL NETS]: D10.2 J2.13 J4.P5 R6.1 SCK.TP U1.6 U2.6
SCL [NORMAL NETS]: J3.4 R2-PINH.1 SENSOR2.4 U2.20 U3.16 U4.7
SDA [NORMAL NETS]: J3.3 R1_PINH.1 SENSOR2.3 U2.19 U3.15 U4.8
SRC [NORMAL NETS]: C4.2 D5.2 L1.1 Q3.3
SS_SD [NORMAL NETS]: D8.2 J4.P2 R10.1 U2.4
TX [NORMAL NETS]: TX.TP U2.25
USB_D+ [NORMAL NETS]: D1.1 U2.14
USB_D- [NORMAL NETS]: D1.3 U2.13
VBAT [POWER NETS]: C2_BAT.1 MCP73831.3 Q1.3 U4.2 U4.3 VBAT.TP
VBUS [POWER NETS]: C1_BAT.1 C4_USB.1 C5_USB.1 CHG_LED.A D1.5 D2.2 MCP73831.4 PFMF.050.1.2 Q1.1 R1_PWRUSB.2 VBUS.TP
VRTC [POWER NETS]: C8.1 C10_SUPERCAP.2 R_CAPACITOR.2 U3.14
VUSB [POWER NETS]: J1.A4 J1.A9 J1.B4 J1.B9 PFMF.050.1.1

## Tracks (layer width: path | path; a pad name or v marks a point on that pad's centre or on a via)
3V3
  Top 0.3: 18.67,105.54 12.27,99.14 11.73,99.14 R10.2 11.58,99.14 10.44,99.14 C9.1 10.29,99.14 9.75,99.14 9.37,98.75 9.37,92.81 6.63,90.07 5.64,90.07 J4.P4 | 18.67,105.54 18.9,105.77 18.9,106.22 R_BOOT.2 | 18.67,105.54 22.94,101.27 47.93,101.27 IC1.2 48.08,101.27 48.77,101.27 49.91,102.41 49.91,102.79 53.19,106.07 R_CHANGE.2 53.87,106.15 54.56,106.15 54.63,106.22 58.37,106.22 R_RESET.2 58.52,106.22 58.52,105.46 60.05,103.94 60.05,103.71 3V3.TP 60.12,103.56 60.12,102.79 78.49,84.43 78.49,52.35 84.28,46.56 | 29.64,29.87 31.55,29.87 31.62,29.95 R7.2 31.77,29.95 34.75,29.95 R8.2 34.98,29.95 70.1,29.95 73.76,33.6 75.51,33.6 76.43,32.69 | 29.64,29.87 28.65,29.87 R6.2 | 8.84,46.63 8.84,47.78 8.76,47.85 U2.2 | 8.84,46.63 8.84,44.81 R1.2 | U1.8 38.18,59.05 38.18,57.84 U1.7 38.02,57.68 37.95,57.68 36.5,56.24 36.5,54.71 35.89,54.1 30.18,54.1 30.1,54.03 | 30.1,54.03 30.1,50.52 R5.2 29.95,50.44 29.41,50.44 25.6,46.63 | 30.1,54.03 29.26,54.86 29.26,55.85 29.95,56.54 30.33,56.54 U1.3 | 25.6,46.63 8.84,46.63 | 29.64,29.87 29.64,42.6 25.6,46.63 | 76.43,32.69 76.81,33.07 76.81,33.6 76.89,33.68 Q2.3 76.89,33.83 76.73,33.98 76.73,36.88 R_CL1.2 76.73,37.03 76.73,39.01 84.28,46.56 | 76.43,32.69 76.28,32.54 76.28,30.33 R9.2 | 86.94,63.93 87.4,63.48 87.4,62.48 U3.2 87.4,62.33 87.4,61.04 89.46,58.98 89.46,51.74 | 86.94,63.93 86.56,64.31 86.56,65.15 R1_PINH1.2 86.56,65.3 86.56,65.84 86.26,66.14 85.88,66.14 84.81,67.21 84.81,67.89 D7.2 | 86.94,63.93 88.7,65.68 89.38,65.68 R2-PINH1.2 | 89.46,51.74 84.28,46.56 | 126.8,32.31 126.8,33.38 128.32,34.9 128.32,35.28 128.4,35.36 IC4.5 128.55,35.43 131.9,35.43 132.28,35.81 C3.+ 132.44,35.81 133.12,35.81 150.11,18.82 164.44,18.82 J3.2
  Top 0.3: 126.8,32.31 126.8,29.79 C1_BAT2.1 | 126.8,32.31 118.26,32.31 98.91,51.66 89.53,51.66 89.46,51.74
32KHZ  (via drill 0.35)
  Top 0.152: v88.39,67.06 89.38,67.06 R2-PINH1.1 | v88.7,64.69 88.7,62.48 U3.1 | v18.21,50.06 17.6,49.45 17.6,47.93 U2.9 | v27.43,58.6 v26.52,57.68 | v38.48,63.02 v36.88,61.42
  Bottom 0.152: v88.39,67.06 88.39,65 v88.7,64.69 88.39,64.92 86.49,63.02 v38.48,63.02 | v18.21,50.06 18.9,50.06 v26.52,57.68 | v27.43,58.6 34.06,58.6 v36.88,61.42
DN
  Top 0.152: J1.A7 162.76,54.48 162.84,54.56 163.22,54.56 163.37,54.41 163.6,54.41 163.68,54.33 163.68,53.49 163.6,53.42 162.76,53.42 J1.B7 162.69,53.42 162.08,53.42 162,53.49 161.93,53.49 161.54,53.11 153.77,53.11 D1.4
DP  (via drill 0.35)
  Top 0.152: 161.7,54.79 161.7,54.03 161.77,53.95 162.69,53.95 J1.A6 | 161.7,54.79 161.85,54.94 162.69,54.94 J1.B6 | v153.92,55.85 153.77,55.7 153.77,55.02 D1.6 | 161.7,54.79 v160.63,55.85
  Bottom 0.152: v160.63,55.85 v153.92,55.85
EPD_3V3
  Top 0.3: 82.07,31.77 82.83,31.77 82.91,31.85 L1.2 | 82.07,31.77 79.93,31.77 77.5,29.34 74.45,29.34 74.14,29.64 74.14,30.94 74.83,31.62 74.83,32.69 Q2.2 | J2.16 82.22,14.33 82.6,14.33 J2.15 82.68,14.4 82.68,14.63 82.53,14.78 82.53,14.94 87.1,19.51 87.1,22.17 87.25,22.33 | 87.25,22.33 86.94,22.63 86.94,24.84 84.12,27.66 84.12,28.27 C7.1 84.12,28.42 84.12,28.96 82.07,31.01 82.07,31.77 | 87.25,22.33 87.4,22.17 88.01,22.17 EPD_C5.2 88.16,22.17 88.7,22.17 89.76,21.11 93.04,21.11 93.19,21.26 95.71,21.26 95.78,21.34 96.77,21.34 EPD_3V3.TP
EPD_3V3_C
  Top 0.3: 74.83,35.66 74.83,34.67 Q2.1 | 74.83,35.66 75.44,36.27 75.44,36.88 R_CL1.1 75.51,36.96 75.51,39.09 77.72,41.3 77.72,42.14 EPD_3V3_C.TP | 74.83,35.66 50.6,59.89 24.77,59.89 20.19,64.47 20.19,65.3 U2.18
EPD_BUSY  (via drill 0.35)
  Top 0.152: v81.46,12.72 85.04,12.72 85.57,13.26 85.57,13.56 85.5,13.64 85.65,13.79 85.65,14.25 J2.9 | v12.5,14.1 12.12,14.48 12.04,14.4 11.73,14.71 11.12,14.71 EPD_BUSY.TP | v9.98,52.27 9.98,65.3 U2.26
  Bottom 0.152: v81.46,12.72 80.31,12.72 78.94,14.1 v12.5,14.1 11.96,14.63 11.96,49.38 9.98,51.36 v9.98,52.27
EPD_CS  (via drill 0.35)
  Top 0.152: v19.51,49.76 20.19,49.07 20.19,47.93 U2.11 | v17.07,45.57 v15.93,44.42 14.48,42.98 14.48,42.9 14.4,42.82 14.48,42.75 EPD_CS.TP | v84.2,15.47 84.2,14.33 J2.12 | v75.51,31.32 75.51,30.79 75.06,30.33 R9.1 | v73,30.18 72.01,30.18 D6.2 71.93,30.1 71.78,29.95 71.25,29.95 v67.97,26.67
  Bottom 0.152: v19.51,49.76 18.82,49.76 18.52,49.45 17.3,49.45 16.99,49.76 16.38,49.76 16.08,49.45 16.08,46.56 v17.07,45.57 | v84.2,15.47 84.2,15.93 75.51,24.61 75.51,30.18 | v75.51,31.32 75.51,30.18 | 75.51,30.18 v73,30.18 | v15.93,44.42 33.68,26.67 v67.97,26.67
EPD_DC  (via drill 0.35)
  Top 0.152: v84.73,13.34 84.66,13.41 84.66,14.25 J2.11 | v14.33,16.46 13.26,17.53 EPD_DC.TP | v12.57,49.15 12.57,47.93 U2.5
  Bottom 0.152: v84.73,13.34 84.12,12.72 82.37,12.72 78.64,16.46 v14.33,16.46 12.57,18.21 v12.57,49.15
EPD_RST  (via drill 0.35)
  Top 0.152: 85.31,15.2 86.11,16 96.77,16 EPD_RST.TP | 85.31,15.2 85.19,15.09 85.19,14.33 J2.10 | v28.19,57.84 27.43,57.07 23.85,57.07 16.38,64.54 16.38,65.3 U2.21 | v38.1,54.48 39.01,54.48 40.08,53.42 41.83,53.42 v42.75,54.33 | 85.31,15.2 v85.19,15.32
  Bottom 0.152: v28.19,57.84 34.75,57.84 v38.1,54.48 | v42.75,54.33 44.42,54.33 83.9,14.86 84.73,14.86 v85.19,15.32
FLASH_CS  (via drill 0.35)
  Top 0.152: D9.2 32.69,49.07 32.61,49.15 30.1,49.15 R5.1 30.02,49.15 29.11,49.15 v29.03,49.07 | 24.73,53.38 21.64,50.29 21.64,48.16 21.41,47.93 U2.12 | 24.73,53.38 29.79,58.45 29.95,58.45 30.33,58.83 U1.1 | 24.73,53.38 v25.53,52.58
  Bottom 0.152: v25.53,52.58 v29.03,49.07
GDR
  Top 0.152: J2.2 89.15,14.25 89.15,13.11 88.16,12.12 78.18,12.12 75.51,14.78 72.08,14.78 71.86,15.01 R4.2 71.78,15.09 71.7,15.16 71.7,15.7 71.4,16 66.14,16 65.84,15.7 65.84,14.94 Q3.1
GND  (via drill 0.35)  (7 unrouted)
  Top 0.152: U2.29_5 13.11,55.09 11.96,55.09 U2.29_2 | v93.19,55.24 94.64,55.24 94.72,55.17 94.72,55.02 94.64,54.94 94.56,54.94 94.49,55.02 94.49,55.09 94.56,55.17 94.64,55.17 94.64,55.09 C10_SUPERCAP.1 | v84.51,54.71 84.51,53.49 84.81,53.19 U3.13 | U4.9 137.95,45.3 138.06,45.19 138.38,45.19 U4.6
  Bottom 0.152: v93.19,55.24 89.15,55.24 89.08,55.32 85.11,55.32 v84.51,54.71
  other vias: 53.31,81.38 23.05,87.75 20.46,26.22 49.13,34.58 41.17,40.75 23.65,43.54 27.23,39.56 61.68,58.68 66.85,37.17 29.42,15.66 13.3,76 16.28,59.67 32.81,100.29 28.23,62.06 34.62,51.7 21.55,51.55 27.71,47.15 39.3,58.6 36.79,58.61
  pour Top: 6.16,47.16 6.14,47.14 6.12,47.12 0.08,47.12 0.08,0.08 74.92,0.08 74.92,10.02 74.94,10.04 74.96,10.06 74.98,10.08 93.22,10.08 93.24,10.06 93.26,10.04 93.28,10.02 93.28,0.08 170.12,0.08 170.12,67.12 92.18,67.12 92.16,67.14 92.14,67.16 92.12,67.18 92.12,111.12 68.68,111.12 68.68,109.88 68.66,109.86 68.64,109.84 68.62,109.82 19.28,109.82 19.26,109.84 19.24,109.86 19.22,109.88 19.22,111.12 0.08,111.12 0.08,65.98 6.12,65.98 6.14,65.96 6.16,65.94 6.18,65.92 6.18,47.18
  pour Bottom: 6.16,47.16 6.14,47.14 6.12,47.12 0.08,47.12 0.08,0.08 74.92,0.08 74.92,10.02 74.94,10.04 74.96,10.06 74.98,10.08 93.22,10.08 93.24,10.06 93.26,10.04 93.28,10.02 93.28,0.08 170.12,0.08 170.12,67.12 92.18,67.12 92.16,67.14 92.14,67.16 92.12,67.18 92.12,111.12 68.68,111.12 68.68,109.88 68.66,109.86 68.64,109.84 68.62,109.82 19.28,109.82 19.26,109.84 19.24,109.86 19.22,109.88 19.22,111.12 0.08,111.12 0.08,65.98 6.12,65.98 6.14,65.96 6.16,65.94 6.18,65.92 6.18,47.18
GPIO8  (via drill 0.35)
  Top 0.152: v9.83,43.89 9.45,43.51 8.84,43.51 R1.1 | v9.37,49.84 17.07,49.84 17.91,50.67 18.52,50.67 18.82,50.37 18.82,47.93 U2.10
  Bottom 0.152: v9.83,43.89 9.83,48.39 9.37,48.84 v9.37,49.84
I2C_PW  (via drill 0.35)
  Top 0.152: C1.1 155.45,2.82 157.12,2.82 C2.1 157.28,2.82 158.88,2.82 R1_PINH.2 158.95,2.82 159.79,2.82 | 159.79,2.82 160.63,2.82 R2-PINH.2 | 158.15,9.94 158.42,10.21 158.42,10.82 SENSOR2.2 | 158.15,9.94 157.62,9.41 | 157.62,9.41 157.58,9.37 157.58,8 SENSOR2.8 | 158.15,9.94 159.18,8.91 159.18,8 SENSOR2.6 159.18,7.92 159.18,7.24 159.79,6.63 159.79,2.82 | v22.02,64.01 21.95,64.01 21.41,64.54 21.41,65.3 U2.17 | 157.62,9.41 v157.5,9.53
  Bottom 0.152: v22.02,64.01 35.2,64.01 58.29,40.92 126.11,40.92 v157.5,9.53
INT_RTC  (via drill 0.35)
  Top 0.152: v16.69,49.15 16.69,49.07 16.38,48.77 16.38,47.93 U2.8 | v30.79,52.5 41.83,52.5 44.35,55.02 44.35,55.47 v44.96,56.08 | v80.31,60.88 84.89,60.88 86.03,62.03 86.03,62.41 U3.3 86.03,62.48 86.03,62.87 85.27,63.63 85.27,65.15 R1_PINH1.1 85.19,65.23 83.74,66.67 v83.74,67.44 | v83.74,70.48 84.81,71.55 INT_RTC.TP
  Bottom 0.152: v16.69,49.15 21.18,49.15 25.22,53.19 30.1,53.19 v30.79,52.5 | v44.96,56.08 75.51,56.08 v80.31,60.88 | v83.74,67.44 v83.74,70.48
IO/BOOT  (via drill 0.35)  (1 unrouted)
  Top 0.152: 28.16,106.57 28.96,107.37 29.49,107.37 29.57,107.44 C6.1 | 28.16,106.57 28.12,106.53 21.34,106.53 20.34,107.52 18.97,107.52 R_BOOT.1 | v28.65,71.02 28.65,70.94 24,66.29 24,65.38 U2.15 | 28.16,106.57 v28.27,106.45 | BOOT_BUTTON.4 BOOT_BUTTON.3
  Bottom 0.152: v28.65,71.02 28.65,106.07 v28.27,106.45
IO/CHANGE  (via drill 0.35)  (1 unrouted)
  Top 0.152: 46.29,106.57 46.33,106.53 52.43,106.53 53.19,107.29 53.8,107.29 R_CHANGE.1 | 46.29,106.57 45.57,107.29 43.81,107.29 C10.1 | v29.26,81.46 16.61,68.81 16.46,68.81 13.79,66.14 13.79,65.38 U2.23 | 46.29,106.57 v46.18,106.45 | CHANGE_BUTTON.4 CHANGE_BUTTON.3
  Bottom 0.152: v29.26,81.46 29.26,89.53 v46.18,106.45
MISO  (via drill 0.35)
  Top 0.152: 7.12,93.69 7.16,93.73 7.16,97.23 7.32,97.38 7.32,97.46 7.24,97.54 7.24,98.07 7.62,98.45 MISO.TP | 7.12,93.69 6.78,93.34 5.87,93.34 J4.P7 | v33.76,29.11 34.14,28.73 34.75,28.73 R8.1 | v33.76,33.91 34.14,34.29 34.59,34.29 34.75,34.44 D12.2 | v31.17,57.15 30.71,57.15 30.4,57.45 30.4,57.76 U1.2 | v9.3,64.01 8.76,64.54 8.76,65.3 U2.27 | v7.16,93.65 7.12,93.69
  Bottom 0.152: v33.76,29.11 v33.76,33.91 31.39,36.27 31.39,52.81 31.17,53.03 v31.17,57.15 27.96,57.15 21.11,64.01 v9.3,64.01 9.3,87.55 6.55,90.3 6.55,91.9 7.16,92.51 v7.16,93.65
MOSI  (via drill 0.35)
  Top 0.152: v82.91,13.34 83.13,13.56 83.13,14.25 J2.14 | v41.53,54.03 40.39,55.17 MOSI.TP 40.31,55.17 39.32,55.17 39.24,55.09 39.17,55.09 39.01,55.24 U1.5 | v32.69,29.18 32.23,28.73 31.7,28.73 R7.1 | v32.77,33.83 32.38,34.21 32,34.21 31.77,34.44 D11.2 | v14.71,49.15 15.01,48.84 15.01,47.93 U2.7 | v7.16,88.77 7.01,88.92 5.87,88.92 J4.P3
  Bottom 0.152: v82.91,13.34 82.22,13.34 50.56,45 | 50.56,45 v41.53,54.03 | 32.69,33.6 32.69,33.76 v32.77,33.83 32.69,33.6 | 32.69,33.6 v32.69,29.18 33.38,28.5 34.06,28.5 50.56,45 | v14.71,49.15 14.1,49.76 13.49,49.76 13.45,49.72 | 13.45,49.72 13.18,49.45 13.18,48.08 26.9,34.37 26.9,33.91 27.2,33.6 32.69,33.6 | v7.16,88.77 8.69,87.25 8.69,54.48 13.45,49.72
N$1  (via drill 0.35)
  Top 0.152: v122.68,44.42 122.38,44.12 122.38,43.43 R1_BAT.2 | v128.4,43.43 128.78,43.81 128.78,44.04 129.08,44.35 MCP73831.1
  Bottom 0.152: v122.68,44.42 127.41,44.42 v128.4,43.43
N$2  (via drill 0.35)
  Top 0.152: D2.1 121.69,33.22 124.74,33.22 124.97,33.45 125.58,33.45 IC4.3 125.65,33.53 126.19,33.53 126.57,33.91 126.57,34.98 v126.64,34.98 | v130.68,30.63 130.99,30.33 130.99,29.64 C1_BAT1.1 | v126.64,34.98 126.26,35.36 125.65,35.36 IC4.1 | Q1.2 134.72,39.62 134.19,39.62 131.83,37.26 128.85,37.26 126.64,35.05 v126.64,34.98
  Bottom 0.152: v130.68,30.63 130.68,30.94 v126.64,34.98
N$3
  Top 0.152: CHG_LED.C 121.01,43.43 R1_BAT.1
N$4
  Top 0.152: R2_BAT.2 117.35,43.43 117.35,44.12 120.4,47.17 127.03,47.17 127.56,46.63 127.56,45.8 126.95,45.19 126.95,44.58 126.72,44.35 126.57,44.35 MCP73831.5
N$5
  Top 0.152: D7.1 86.87,67.89 86.87,67.67 88.24,66.29 89.99,66.29 91.59,64.69 91.59,54.1 R_CAPACITOR.1
N$6
  Top 0.152: IC1.5 50.9,102.18 52.43,102.18 52.65,101.96 53.26,101.96 C_DELAY.1
N$7
  Top 0.152: R2-USB1.2 154.08,49.84 158.72,49.84 161.85,52.96 162.69,52.96 J1.A5
N$8
  Top 0.152: C4.1 95.17,40.16 94.64,40.16 93.04,38.56 93.04,38.33 92.81,38.1 92.2,38.1 92.13,38.02 D3.2 92.05,37.95 92.05,33.22 D4.1
N$9  (via drill 0.35)
  Top 0.152: v88.47,15.39 88.16,15.09 J2.4 | v93.42,21.95 93.34,22.02 92.51,22.02 92.43,21.95 EPD_C1.2
  Bottom 0.152: v88.47,15.39 88.47,16.99 v93.42,21.95
N$10  (via drill 0.35)
  Top 0.152: v152.78,49.84 151.87,49.84 R2-USB.1 | v161.54,55.85 161.77,55.85 161.85,55.93 162.69,55.93 J1.B5
  Bottom 0.152: v152.78,49.84 155.52,49.84 v161.54,55.85
N$11  (via drill 0.35)
  Top 0.152: v87.55,15.32 87.71,15.16 87.71,14.33 J2.5 | v91.36,21.79 91.29,21.87 90.53,21.87 90.37,22.02 EPD_C2.2
  Bottom 0.152: v87.55,15.32 87.55,17.98 v91.36,21.79
N$12
  Top 0.152: J2.22 79.17,19.58 77.19,21.57 77.19,21.95 77.04,22.1 EPD_C10.2
N$15
  Top 0.152: J2.24 78.18,14.71 78.11,14.78 78.11,14.94 78.26,15.09 78.26,18.44 75.06,21.64 75.06,22.02 74.91,22.17 EPD_C12.2
N$16
  Top 0.152: J2.19 80.7,14.33 80.7,20.34 82.6,22.25 82.6,24 82.91,24.31 84.28,24.31 84.89,23.7 84.89,22.55 85.11,22.33 85.72,22.33 85.88,22.17 EPD_C7.2
N$17
  Top 0.152: J2.20 80.16,20.73 81,21.57 81,22.02 81.08,22.1 EPD_C8.2
N$18
  Top 0.152: J2.18 81.15,14.33 81.15,19.36 83.36,21.57 83.36,21.87 83.59,22.1 EPD_C6.2
PREVGH  (via drill 0.35)
  Top 0.152: 79.67,21.22 79.32,21.57 79.32,21.87 79.1,22.1 EPD_C9.2 | 79.67,21.22 79.7,21.18 79.7,14.33 J2.21 | v84.58,40.31 84.58,41.22 D5.1 | v79.78,21.26 79.7,21.26 79.67,21.22
  Bottom 0.152: v84.58,40.31 84.58,26.06 v79.78,21.26
PREVGL  (via drill 0.35)
  Top 0.152: 78.6,13.53 78.56,13.49 77.27,13.49 71.48,19.28 70.48,19.28 70.41,19.36 EPD_C11.2 | 78.6,13.53 78.64,13.56 78.64,14.25 J2.23 | v88.62,32.16 88.62,33.15 D4.2 | 78.6,13.53 v78.79,13.34
  Bottom 0.152: v88.62,32.16 88.62,19.51 85.8,16.69 85.8,13.49 84.43,12.12 80.01,12.12 v78.79,13.34
RESE  (via drill 0.35)
  Top 0.152: v88.47,13.34 88.7,13.56 88.7,14.25 J2.3 | R3.2 67.51,11.05 67.59,11.12 68.12,11.12 v68.5,11.51 68.43,11.51 67.13,12.8 Q3.2
  Bottom 0.152: v88.47,13.34 86.11,13.34 84.28,11.51 v68.5,11.51
RESE'
  Top 0.152: R3.1 67.51,9.68 68.28,9.68 69.49,8.46 71.17,8.46 71.48,8.76 71.48,9.45 71.78,9.75 SJ1.2 71.78,9.83 71.78,12.88 R2.2
RESET  (via drill 0.35)
  Top 0.152: 49.95,103.59 53.19,106.83 53.26,106.76 53.42,106.76 53.49,106.68 54.1,106.68 54.18,106.76 54.33,106.76 55.02,107.44 58.37,107.44 58.45,107.52 R_RESET.1 58.45,107.44 59.13,107.44 60.05,106.53 66.67,106.53 67.51,107.37 68.58,107.37 | 49.95,103.59 49.38,103.02 49.38,102.87 48.69,102.18 48.08,102.18 IC1.1 | 68.58,107.37 C5.1 | v9.98,49.15 9.98,47.93 U2.3 | 49.95,103.59 v49.84,103.71 | RESET_BUTTON.4 RESET_BUTTON.3 66.91,109.04 68.58,107.37
  Bottom 0.152: v9.98,49.15 9.98,50.44 7.24,53.19 7.24,86.79 6.25,87.78 6.25,93.65 19.66,107.06 46.48,107.06 v49.84,103.71
RTC_RST  (via drill 0.35)
  Top 0.152: v33.53,67.89 29.79,64.16 23.09,64.16 22.71,64.54 22.71,65.3 U2.16 | v80.31,64.01 83.59,64.01 84.81,62.79 84.81,62.48 U3.4
  Bottom 0.152: v33.53,67.89 76.43,67.89 v80.31,64.01
RX
  Top 0.152: U2.24 12.57,65.38 12.57,66.14 15.47,69.04 15.47,69.65 15.85,70.03 RX.TP
SCK  (via drill 0.35)
  Top 0.152: 27.62,34.1 27.89,34.37 28.35,34.37 28.5,34.52 D10.2 | 27.62,34.1 27.58,34.06 27.58,28.96 27.96,28.57 28.57,28.57 R6.1 | v13.79,49.15 13.79,47.93 U2.6 | 27.62,34.1 v27.51,34.21 | SCK.TP 5.18,98.45 5.18,97.92 4.8,97.54 4.88,97.46 4.88,97.38 4.65,97.16 4.65,94.41 4.34,94.11 4.34,91.67 4.88,91.14 5.79,91.14 J4.P5 5.87,91.14 6.78,91.14 7.16,91.52 v7.16,91.59 | v83.82,13.34 83.67,13.49 83.67,14.25 J2.13 | v39.17,56.24 38.79,56.62 38.71,56.62 38.56,56.46 38.18,56.46 U1.6 | v37.64,60.66 v38.79,61.8 | v32,47.47 v30.79,46.25
  Bottom 0.152: v13.79,49.15 13.79,47.93 23.13,38.59 | 23.13,38.59 v27.51,34.21 | v83.82,13.34 43.43,53.72 42.44,53.72 42.14,54.03 42.14,54.33 40.5,55.97 | 40.5,55.97 40.23,56.24 v39.17,56.24 37.64,57.76 v37.64,60.66 | v7.16,91.59 31.77,66.98 33.15,66.98 38.33,61.8 v38.79,61.8 | v30.79,46.25 23.13,38.59 | 40.5,55.97 v32,47.47
SCL  (via drill 0.35)
  Top 0.152: R2-PINH.1 160.71,4.12 160.71,7.24 160.78,7.32 160.78,9.37 159.94,10.21 159.94,10.82 SENSOR2.4 160.02,10.9 v160.02,11.96 | v139.45,45.34 139.22,45.57 139.14,45.49 138.91,45.49 138.84,45.57 138.53,45.57 U4.7 | v163.3,21.18 163.68,20.8 164.44,20.8 J3.4 | v18.14,66.67 17.6,66.14 17.6,65.38 U2.20 | v81,60.27 81.84,60.27 88.09,54.03 | 88.09,54.03 88.62,53.49 88.62,53.19 U3.16 | 88.09,54.03 v88.77,54.71
  Bottom 0.152: v160.02,11.96 160.02,16 163.91,19.89 163.91,20.57 v163.3,21.18 139.45,45.03 v139.45,45.34 139.45,47.09 133.73,52.81 90.68,52.81 v88.77,54.71 | v18.14,66.67 32.99,66.67 38.48,61.19 79.7,61.19 80.01,61.49 80.62,61.49 81,61.11 v81,60.27
SDA  (via drill 0.35)
  Top 0.152: 158.99,11.85 159.18,11.66 SENSOR2.3 | 158.99,11.85 158.95,11.89 157.12,11.89 156.82,11.58 156.82,7.47 158.95,5.33 158.95,4.12 R1_PINH.1 | v138.53,46.79 138.53,46.1 U4.8 | v163.3,20.19 163.68,19.81 164.44,19.81 J3.3 | v159.03,11.96 159.03,11.89 158.99,11.85 | v29.57,71.02 28.96,71.63 24.38,71.63 18.9,66.14 18.9,65.38 U2.19 | v81.61,59.59 87.33,53.87 87.33,53.19 U3.15 87.4,53.11 87.4,52.73 88.24,51.89 v88.24,51.51
  Bottom 0.152: v159.03,11.96 159.03,16 163.22,20.19 v163.3,20.19 138.53,44.96 v138.53,46.79 138.53,47.55 134.57,51.51 v88.24,51.51 | v29.57,71.02 32.92,67.67 32.92,67.59 33.22,67.28 33.3,67.28 38.18,62.41 80.16,62.41 81.61,60.96 v81.61,59.59
SRC  (via drill 0.35)
  Top 0.152: C4.2 95.17,41.53 93.8,41.53 89,36.73 83.21,36.73 82.98,36.5 L1.1 82.91,36.42 82.45,36.42 82.41,36.39 | v76.12,27.43 66.52,17.83 66.52,16.99 Q3.3 | v81.58,34.45 82.96,35.84 82.41,36.39 | D5.2 81.08,41.22 81.08,38.1 82.37,36.8 82.37,36.42 82.41,36.39
  Bottom 0.152: v76.12,27.43 76.12,29 v81.58,34.45
SS_SD  (via drill 0.35)
  Top 0.152: D8.2 15.09,97.69 14.94,97.84 14.94,98.3 14.55,98.68 12.95,98.68 12.19,97.92 11.66,97.92 R10.1 11.66,97.84 11.66,92.05 7.32,87.71 v7.54,87.4 7.16,87.78 6.25,87.78 J4.P2 | v11.28,49.15 11.28,47.93 U2.4
  Bottom 0.152: v11.28,49.15 11.28,49.61 7.54,53.34 v7.54,87.4
TX
  Top 0.152: U2.25 11.28,65.38 11.28,66.29 12.8,67.82 12.8,67.97 13.18,68.35 13.18,68.81 TX.TP
USB_D+  (via drill 0.35)
  Top 0.152: v137.31,47.85 144.47,55.02 151.18,55.02 D1.1 | v44.96,55.17 37.95,48.16 v30.79,48.16 | v24.99,48.16 24.92,48.23 24.31,48.23 24,47.93 U2.14
  Bottom 0.152: v137.31,47.85 52.27,47.85 v44.96,55.17 | v24.99,48.16 v30.79,48.16
USB_D-  (via drill 0.35)
  Top 0.152: v150.11,53.11 151.18,53.11 D1.3 | v45.87,55.17 36.35,45.64 30.48,45.64 v29.87,46.25 | v23.09,49.15 23.09,49 22.86,48.77 22.86,48.08 22.71,47.93 U2.13
  Bottom 0.152: v150.11,53.11 96.24,53.11 93.5,55.85 75.74,55.85 75.06,55.17 v45.87,55.17 | v29.87,46.25 25.98,46.25 v23.09,49.15
VBAT
  Top 0.3: C2_BAT.1 126.42,41.22 126.42,42.6 127.94,44.12 127.94,45.87 128.25,46.18 129.08,46.18 MCP73831.3 129.24,46.18 130.76,46.18 133.81,43.13 | 136.55,45.26 136.55,45.49 U4.2 | 136.55,45.26 136.55,45.11 U4.3 | 133.81,43.13 133.81,41.83 Q1.3 | 135.79,45.11 135.94,45.26 136.55,45.26 | 135.79,45.11 133.81,43.13 | 135.79,45.11 135.56,45.34 135.56,47.4 136.55,48.39 136.55,49.23 VBAT.TP
VBUS
  Top 0.3: R1_PWRUSB.2 118.64,34.9 120.62,34.9 121.01,35.28 121.61,35.28 D2.2 121.61,35.43 121.61,41.22 122.53,42.14 | 123.37,46.33 125.58,46.33 125.73,46.18 126.49,46.18 MCP73831.4 | 123.37,46.33 122.53,46.33 CHG_LED.A | 122.53,42.14 123.37,42.98 123.37,46.33 | VBUS.TP 153.69,62.56 153.69,61.72 154.15,61.27 154.15,60.5 153.77,60.12 153.77,59.59 C5_USB.1 153.77,59.44 153.77,57.61 C4_USB.1 153.77,57.53 153.77,57 154.84,55.93 154.84,54.25 154.61,54.03 153.77,54.03 D1.5 153.62,53.95 152.86,53.95 152.48,53.57 152.48,52.05 149.88,49.45 149.88,44.88 149.43,44.42 PFMF.050.1.2 149.43,44.27 145.24,40.08 140.51,40.08 C1_BAT.1 140.36,40.08 139.75,40.08 139.22,40.62 134.11,40.62 133.88,40.39 133.88,40.23 133.35,39.7 132.89,39.7 Q1.1 132.74,39.62 132.28,39.62 131.6,38.94 125.73,38.94 122.53,42.14
VRTC
  Top 0.3: 92.51,52.73 94.49,52.73 94.56,52.81 C10_SUPERCAP.2 | 92.51,52.73 91.67,52.73 R_CAPACITOR.2 | C8.1 85.88,50.22 85.88,51.59 86.11,51.82 86.11,53.11 U3.14 86.11,53.26 86.11,54.41 85.88,54.63 85.57,54.63 78.94,61.27 78.94,63.63 84.12,68.81 89.08,68.81 90.37,67.51 90.37,67.13 92.51,65 92.51,52.73
VUSB  (2 unrouted)
  Top 0.3: J1.B9 J1.A4 | J1.A9 J1.B4